# EAGLE board atlas_quad (EAGLE 8.5.0)
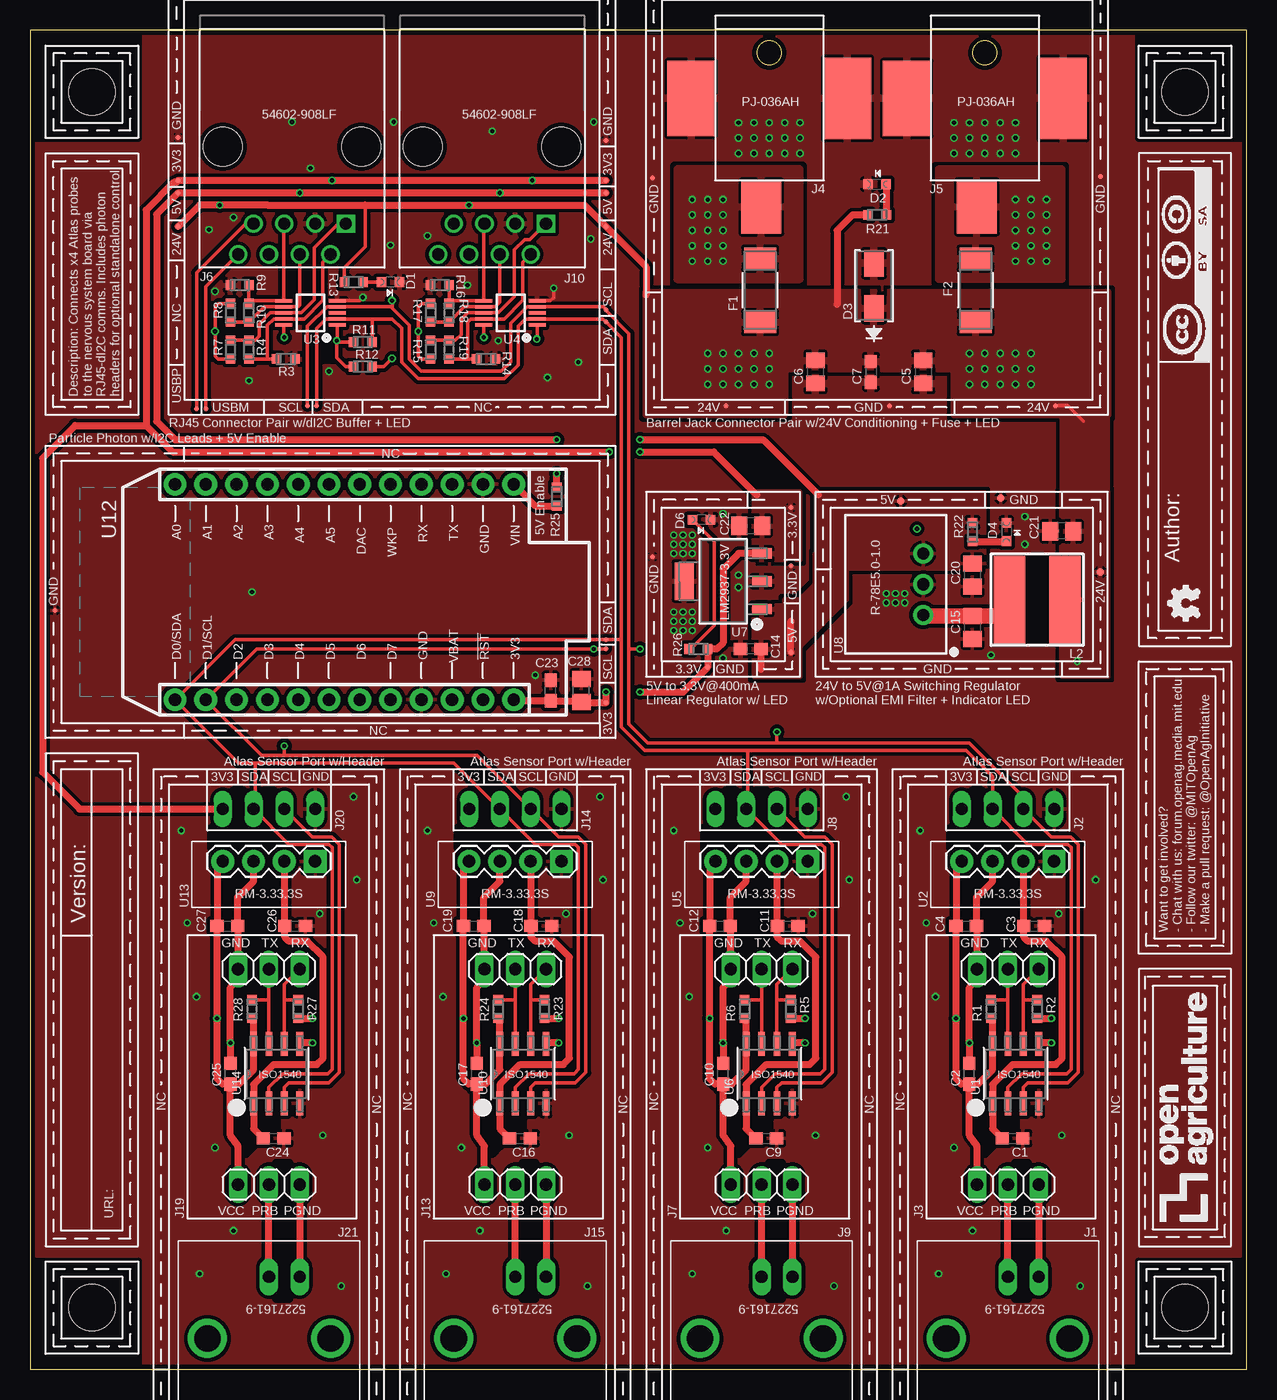
[diagram p0: board, top side]
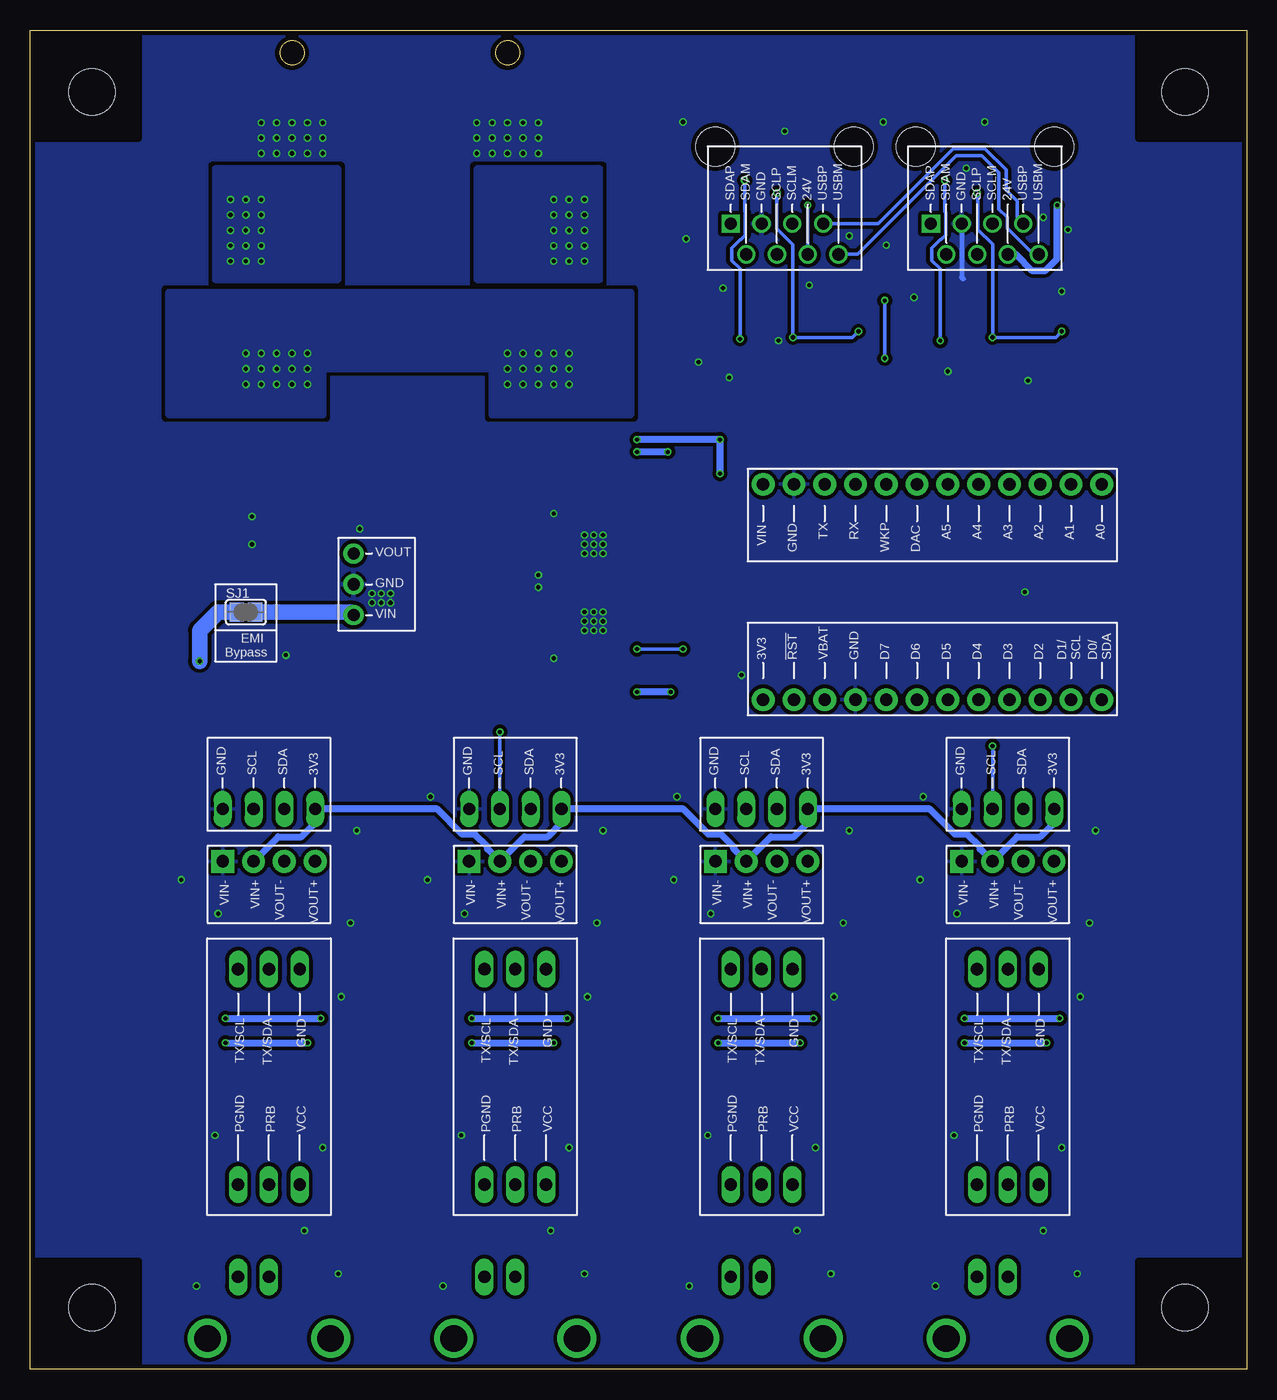
[diagram p1: board, bottom side, seen from below]

Size 100.33 x 110.49 mm. Coordinates in mm from the lower left corner, seen from the top.
Outline: 100.33,0 100.33,110.49 0,110.49 0,0 100.33,0
Copper layers (1*16): Top 0.035559375mm / dielectric 1.6mm / Bottom 0.035559375mm
Design rules "oshpark-2layer-mask": minimum track width 6mil, minimum drill 10mil, track to track 6mil, track to pad 6mil, pad to pad 6mil, via to via 6mil, smd to smd 6mil, copper to edge 15mil, drill to drill 6mil, minimum pad ring 5mil, minimum via ring 5mil, stop-mask expansion 2.5mil, vias tented up to drill 20mil, thermal gap 10mil
tRestrict: 28 lines

## Footprints (pad centres in the part's own frame; a part is rotated, then mirrored left to right if it is on the bottom)
C0603 = smd 1.1 x 1: 1 -0.85,0; 2 0.85,0
C0805 = smd 1.3 x 1.5: 1 -0.95,0; 2 0.95,0
CHIPLED_0603 = smd 0.8 x 0.8: A 0,-0.75; C 0,0.75
SMA = smd 2.18 x 1.63: 1 -1.857,0; 2 1.857,0
SS = smd 1.803 x 2.642: 1 -2.629,0; 2 2.629,0
BNC-5227161 = drill 2.2: 3 -5.08,0; 4 5.08,0 | drill 1.016 long: GND -2.54,-5.08; S 0,-5.08
HEADER-I2C = drill 1 long: 3V3 3.81,0.762; GND -3.81,0.762; SCL -1.27,0.762; SDA 1.27,0.762
ATLAS-STAMP = drill 1.016 long: 1 -8.89,2.54; 2 -8.89,0; 3 -8.89,-2.54; 4 8.89,-2.54; 5 8.89,0; 6 8.89,2.54
BARREL-JACK-PJ-036AH = smd 4.4 x 3.3: 1 2.2,-0.65 | smd 6.75 x 3.9: 2 -6.75,6.45 | smd 6.2 x 3.9: 3 -6.75,-6.45
RJ45-DI2C-USB-54602-908LF = drill 1: 24V(6) 1.905,8.89; DSCLM(5) 0.635,6.35; DSCLP(4) -0.635,8.89; DSDAM(2) -3.175,8.89; GND(3) -1.905,6.35; USBM(8) 4.445,8.89; USBP(7) 3.175,6.35 | drill 1 square: DSDAP(1) -4.445,6.35 | hole 3.2: -5.715,0; 5.715,0
29333C = smd 2.6 x 7.2: 1 -2.3,0; 2 2.3,0
RC0603N = smd 0.756 x 0.8: 1 -0.778,0; 2 0.778,0
EMI-BYPASS = smd 1.168 x 1.6: 1 -0.762,0.254; 2 0.762,0.254
TP04R = smd 0.4 x 0.4: 1 0,0
TP06R = smd 0.6 x 0.6: TP 0,0
D8 = smd 1.981 x 0.559: 1 -2.464,1.905; 2 -2.464,0.635; 3 -2.464,-0.635; 4 -2.464,-1.905; 5 2.464,-1.905; 6 2.464,-0.635; 7 2.464,0.635; 8 2.464,1.905
RM3.33.3S-SIP4 = drill 1.016 pad 1.88 square: 1 0,0 | drill 1.016 pad 1.88: 2 2.54,0; 3 5.08,0; 4 7.62,0
SOP50P490X110-10N = smd 1.4 x 0.3: 1 -2.2,1; 2 -2.2,0.5; 3 -2.2,0; 4 -2.2,-0.5; 5 -2.2,-1; 6 2.2,-1; 7 2.2,-0.5; 8 2.2,0; 9 2.2,0.5; 10 2.2,1
MP04A = smd 1.6 x 0.838: 1 -3.2,2.3; 2 -3.2,0; 3 -3.2,-2.3 | smd 1.6 x 3.099: 4 3.2,0
R-78E5.0-1.0 = drill 1 pad 1.676: 1 -2.54,0; 2 0,0; 3 2.54,0
PHOTON = drill 1.016 pad 1.88: 1 1.27,32.258; 2 1.27,29.718; 3 1.27,27.178; 4 1.27,24.638; 5 1.27,22.098; 6 1.27,19.558; 7 1.27,17.018; 8 1.27,14.478; 9 1.27,11.938; 10 1.27,9.398; 11 1.27,6.858; 12 1.27,4.318; 13 19.05,4.318; 14 19.05,6.858; 15 19.05,9.398; 16 19.05,11.938; 17 19.05,14.478; 18 19.05,17.018; 19 19.05,19.558; 20 19.05,22.098; 21 19.05,24.638; 22 19.05,27.178; 23 19.05,29.718; 24 19.05,32.258
CORNER-150 = hole 3.81: 0,0

## Placement (x,y rotation side)
C1  0.1uF  [C0603]  81.03,19.05 0 top
C2  0.1uF  [C0603]  77.47,24.38 90 top
C3  0.1uF  [C0603]  82.8,36.58 0 top
C4  0.1uF  [C0603]  77.22,36.58 0 top
C5  10uF  [C0805]  73.66,82.3 270 top
C6  4.7uF  [C0805]  64.77,82.3 270 top
C7  0.1uF  [C0603]  69.34,82.3 270 top
C9  0.1uF  [C0603]  60.71,19.05 0 top
C10  0.1uF  [C0603]  57.15,24.38 90 top
C11  0.1uF  [C0603]  62.48,36.58 0 top
C12  0.1uF  [C0603]  56.9,36.58 0 top
C14  0.1uF  [C0603]  59.44,59.44 180 top
C15  10uF  [C0805]  77.72,61.21 270 top
C16  0.1uF  [C0603]  40.39,19.05 0 top
C17  0.1uF  [C0603]  36.83,24.38 90 top
C18  0.1uF  [C0603]  42.16,36.58 0 top
C19  0.1uF  [C0603]  36.58,36.58 0 top
C20  10uF  [C0805]  77.72,65.53 270 top
C21  10uF  [C0805]  85.09,69.15 180 top
C22  10uF  [C0805]  59.44,69.6 180 top
C23  0.1uF  [C0603]  42.93,56.01 90 top
C24  0.1uF  [C0603]  20.07,19.05 0 top
C25  0.1uF  [C0603]  16.51,24.38 90 top
C26  0.1uF  [C0603]  21.84,36.58 0 top
C27  0.1uF  [C0603]  16.26,36.58 0 top
C28  4.7uF  [C0805]  45.47,56.01 90 top
D1  APT1608  [CHIPLED_0603]  29.72,89.71 270 top
D2  APT1608  [CHIPLED_0603]  69.85,97.79 90 top
D3  SMAJ26A  [SMA]  69.6,89.41 90 top
D4  APT1608  [CHIPLED_0603]  80.52,69.09 0 top
D6  APT1608  [CHIPLED_0603]  55.37,70.1 270 top
F1  SSQ5  [SS]  60.2,89.03 270 top
F2  SSQ5  [SS]  77.98,89.03 270 top
J1  5227161-9  [BNC-5227161]  80.64,2.54 180 top
J2  I2C-HEADER  [HEADER-I2C]  80.64,46.99 180 top
J3  ATLAS-STAMP  [ATLAS-STAMP]  80.64,24.13 270 top
J4  PJ-036AH  [BARREL-JACK-PJ-036AH]  60.96,98.12 270 top
J5  PJ-036AH  [BARREL-JACK-PJ-036AH]  78.74,98.12 270 top
J6  54602-908LF  [RJ45-DI2C-USB-54602-908LF]  21.59,100.89 180 top
J7  ATLAS-STAMP  [ATLAS-STAMP]  60.33,24.13 270 top
J8  I2C-HEADER  [HEADER-I2C]  60.33,46.99 180 top
J9  5227161-9  [BNC-5227161]  60.33,2.54 180 top
J10  54602-908LF  [RJ45-DI2C-USB-54602-908LF]  38.1,100.89 180 top
J13  ATLAS-STAMP  [ATLAS-STAMP]  40.01,24.13 270 top
J14  I2C-HEADER  [HEADER-I2C]  40.01,46.99 180 top
J15  5227161-9  [BNC-5227161]  40.01,2.54 180 top
J19  ATLAS-STAMP  [ATLAS-STAMP]  19.68,24.13 270 top
J20  I2C-HEADER  [HEADER-I2C]  19.68,46.99 180 top
J21  5227161-9  [BNC-5227161]  19.68,2.54 180 top
L2  33uH  [29333C]  83.06,63.5 180 top
R1  2.2k  [RC0603N]  79.25,29.72 270 top
R2  2.2k  [RC0603N]  83.06,29.72 270 top
R3  600  [RC0603N]  21.08,83.36 0 top
R4  120  [RC0603N]  18.03,84.12 270 top
R5  2.2k  [RC0603N]  62.74,29.72 270 top
R6  2.2k  [RC0603N]  58.93,29.72 270 top
R7  600  [RC0603N]  16.51,84.12 90 top
R8  600  [RC0603N]  16.51,87.17 90 top
R9  600  [RC0603N]  17.27,89.46 0 top
R10  120  [RC0603N]  18.03,87.17 270 top
R11  10K  [RC0603N]  27.43,84.76 180 top
R12  10K  [RC0603N]  27.43,82.73 180 top
R13  1K  [RC0603N]  26.67,89.71 180 top
R14  600  [RC0603N]  37.59,83.36 0 top
R15  600  [RC0603N]  33.02,84.12 90 top
R16  600  [RC0603N]  33.78,89.46 0 top
R17  600  [RC0603N]  33.02,87.17 90 top
R18  120  [RC0603N]  34.54,87.17 270 top
R19  120  [RC0603N]  34.54,84.12 270 top
R21  100  [RC0603N]  69.85,95.25 180 top
R22  100  [RC0603N]  77.72,69.09 90 top
R23  2.2k  [RC0603N]  42.42,29.72 270 top
R24  2.2k  [RC0603N]  38.61,29.72 270 top
R25  0 OHM  [RC0603N]  43.43,72.01 270 top
R26  100  [RC0603N]  55.12,59.44 0 top
R27  2.2k  [RC0603N]  22.1,29.72 270 top
R28  2.2k  [RC0603N]  18.29,29.72 270 top
SJ1  [EMI-BYPASS]  82.55,62.23 0 bottom
TP1  TPTP04R  [TP04R]  12.19,98.09 270 top
TP2  TPTP04R  [TP04R]  12.19,97.08 270 top
TP3  TPTP04R  [TP04R]  12.19,101.65 270 top
TP4  TPTP04R  [TP04R]  12.19,94.28 270 top
TP5  TPTP04R  [TP04R]  23.62,79.5 270 top
TP6  TPTP04R  [TP04R]  22.86,79.5 270 top
TP7  TPTP04R  [TP04R]  13.72,79.25 270 top
TP8  TPTP04R  [TP04R]  14.48,79.25 270 top
TP9  TPTP04R  [TP04R]  47.5,98.09 270 top
TP10  TPTP04R  [TP04R]  47.5,97.08 270 top
TP11  TPTP04R  [TP04R]  47.5,94.28 270 top
TP12  TPTP04R  [TP04R]  47.5,101.4 270 top
TP13  TPTP04R  [TP04R]  47.5,87.43 270 top
TP14  TPTP04R  [TP04R]  47.5,86.41 270 top
TP15  TPTP04R  [TP04R]  51.31,98.3 0 top
TP17  TPTP04R  [TP04R]  84.58,79.5 0 top
TP18  TPTP04R  [TP04R]  70.87,79.5 0 top
TP19  TPTP04R  [TP04R]  88.27,98.42 0 top
TP20  TPTP04R  [TP04R]  57.4,79.5 0 top
TP23  TPTP06R  [TP06R]  71.82,71.63 90 top
TP24  TPTP06R  [TP06R]  88.27,65.79 90 top
TP25  TPTP06R  [TP06R]  80.07,71.88 90 top
TP28  TPTP04R  [TP04R]  55.88,57.91 90 top
TP29  TPTP04R  [TP04R]  62.74,59.18 90 top
TP30  TPTP04R  [TP04R]  51.31,67.06 90 top
TP31  TPTP04R  [TP04R]  62.74,71.12 90 top
TP32  TPTP04R  [TP04R]  62.74,66.29 90 top
TP58  TPTP04R  [TP04R]  47.5,59.44 180 top
TP71  TPTP04R  [TP04R]  47.5,54.99 180 top
TP72  TPTP04R  [TP04R]  2.03,62.61 180 top
TP73  TPTP04R  [TP04R]  47.5,60.2 180 top
U1  ISO1540  [D8]  81.28,24.38 90 top
U2  RM-3.33.3S  [RM3.33.3S-SIP4]  84.45,41.91 180 top
U3  PCA9615  [SOP50P490X110-10N]  23.11,87.17 180 top
U4  PCA9615  [SOP50P490X110-10N]  39.62,87.17 180 top
U5  RM-3.33.3S  [RM3.33.3S-SIP4]  64.14,41.91 180 top
U6  ISO1540  [D8]  60.96,24.38 90 top
U7  LM2937-3.3V  [MP04A]  57.15,65.02 180 top
U8  R-78E5.0-1.0  [R-78E5.0-1.0]  73.66,64.77 90 top
U9  RM-3.33.3S  [RM3.33.3S-SIP4]  43.81,41.91 180 top
U10  ISO1540  [D8]  40.64,24.38 90 top
U12  PHOTONH  [PHOTON]  7.62,74.3 270 top
U13  RM-3.33.3S  [RM3.33.3S-SIP4]  23.5,41.91 180 top
U14  ISO1540  [D8]  20.32,24.38 90 top
U$1  [CORNER-150]  95.25,5.08 90 top
U$2  [CORNER-150]  95.25,105.41 180 top
U$3  [CORNER-150]  5.08,5.08 0 top
U$4  [CORNER-150]  5.08,105.41 270 top
U$5  AUTHOR  [AUTHOR]  99.06,59.69 90 top
U$6  TITLE  [TITLE]  8.89,10.16 90 top
U$8  [LOGO-900X300]  99.06,10.16 90 top

## Library data of the parts
C1-C4 C7 C9-C12 C14 C16-C19 C23-C27 = openag-capacitors; MANUFACTURER: Kemet; MPN: C0603C104K5RACTU; VENDOR: Digikey; VLINK: https://www.digikey.com/product-detail/en/kemet/C0603C104K5RACTU/399-5089-1-ND/1465623; VPN: 399-5089-1-ND
C5 C15 C20-C22 = openag-capacitors; MANUFACTURER: Taiyo Yuden; MPN: GMK212BBJ106KG-T; VENDOR: Digikey; VLINK: https://www.digikey.com/product-detail/en/taiyo-yuden/GMK212BBJ106KG-T/587-4893-1-ND/6563736; VPN: 587-4893-1-ND
C6 C28 = openag-capacitors; MANUFACTURER: Samsung; MPN: CL21A475KBQNNNE; VENDOR: Digikey; VLINK: https://www.digikey.com/product-detail/en/samsung-electro-mechanics/CL21A475KBQNNNE/1276-1248-1-ND/3889334; VPN: 1276-1248-1-ND
D1 D2 D4 D6 = openag-diodes; MANUFACTURER: Kingbright; MPN: APT1608CGCK; VENDOR: Digikey; VLINK: https://www.digikey.com/product-detail/en/kingbright/APT1608CGCK/754-1116-1-ND/1747833#; VPN: 754-1116-1-ND
D3 = openag-diodes; MANUFACTURER: Diodes Incorporated; MPN: SMAJ26A-13-F; VENDOR: Digikey; VLINK: https://www.digikey.com/product-detail/en/diodes-incorporated/SMAJ26A-13-F/SMAJ26A-FDICT-ND/806583; VPN: SMAJ26A-FDICT-ND
F1 F2 = openag-fuses; MANUFACTURER: Bel Fuse Inc.; MPN: SSQ5; VENDOR: Digikey; VLINK: https://www.digikey.com/product-detail/en/bel-fuse-inc/SSQ-5/507-1053-1-ND/615005; VPN: 507-1053-1-ND
J1 J9 J15 J21 = openag-connectors; MANUFACTURER: TE Connectivity AMP Connectors; MPN: 5227161-9; VENDOR: Digikey; VLINK: https://www.digikey.com/product-detail/en/te-connectivity-amp-connectors/5227161-9/A32261-ND/811159; VPN: A32261-ND
J2 J3 J7 J8 J13 J14 J19 J20 SJ1 = openag-connectors; MPN: N/A
J4 J5 = openag-connectors; MANUFACTURER: CUI Inc.; MPN: PJ-036AH-SMT-TR; VENDOR: Digikey; VLINK: https://www.digikey.com/product-detail/en/cui-inc/PJ-036AH-SMT-TR/CP-036AHPJCT-ND/1530994; VPN: CP-036AHPJCT-ND
J6 J10 = openag-connectors; MANUFACTURER: Amphenol FCI; MPN: 54602-908LF; VENDOR: Digikey; VLINK: https://www.digikey.com/product-detail/en/amphenol-fci/54602-908LF/609-1046-ND/1001360; VPN: 609-1046-ND
L2 = openag-inductors; MANUFACTURER: Murata Power Solutions Inc.; MPN: 29333C; VENDOR: Digikey; VLINK: https://www.digikey.com/product-detail/en/murata-power-solutions-inc/29333C/811-1138-1-ND/1924860; VPN: 811-1138-1-ND
R1 R2 R5 R6 R23 R24 R27 R28 = openag-resistors; MANUFACTURER: Yageo; MPN: RC0603JR-072K2L; VENDOR: Digikey; VLINK: https://www.digikey.com/product-detail/en/yageo/RC0603JR-072K2L/311-2.2KGRCT-ND/729676#; VPN: 311-2.2KGRCT-ND
R3 R7-R9 R14-R17 = openag-resistors; MANUFACTURER: Yageo; MPN: RC0603FR-07604RL; VENDOR: Digikey; VLINK: https://www.digikey.com/product-detail/en/yageo/RC0603FR-07604RL/311-604HRCT-ND/730276; VPN: 311-604HRCT-ND
R4 R10 R18 R19 = openag-resistors; MANUFACTURER: Yageo; MPN: RC0603FR-07120RL; VENDOR: Digikey; VLINK: https://www.digikey.com/product-detail/en/yageo/RC0603FR-07120RL/311-120HRCT-ND/729867; VPN: 311-120HRCT-ND
R11 R12 = openag-resistors; MANUFACTURER: Panasonic; MPN: ERJ-3EKF1002V; VENDOR: Digikey; VLINK: https://www.digikey.com/product-detail/en/panasonic-electronic-components/ERJ-3EKF1002V/P10.0KHCT-ND/198102; VPN: P10.0KHCT-ND
R13 = openag-resistors; MANUFACTURER: Panasonic; MPN: P20283CT-ND; VENDOR: Digikey; VLINK: https://www.digikey.com/product-detail/en/panasonic-electronic-components/ERJ-PB3D1001V/P20283CT-ND/6214538; VPN: P20283CT-ND
R21 R22 R26 = openag-resistors; MANUFACTURER: Yageo; MPN: RC0603JR-07100RL; VENDOR: Digikey; VLINK: https://www.digikey.com/product-detail/en/yageo/RC0603JR-07100RL/311-100GRCT-ND/729644; VPN: 311-100GRCT-ND
R25 = openag-resistors; MANUFACTURER: Yageo; MPN: RC0603JR-070RL; VENDOR: Digikey; VLINK: https://www.digikey.com/product-detail/en/yageo/RC0603JR-070RL/311-0.0GRCT-ND/729622; VPN: 311-0.0GRCT-ND
TP1-TP15 TP17-TP20 TP23-TP25 TP28-TP32 TP58 TP71-TP73 = openag-testpads; MPN: N/A
U1 U6 U10 U14 = openag-isolators; MANUFACTURER: Texas Instruments; MPN: ISO1540DR; VENDOR: Digikey; VLINK: https://www.digikey.com/product-detail/en/texas-instruments/ISO1540DR/296-34871-1-ND/3587214; VPN: 296-34871-1-ND
U2 U5 U9 U13 = openag-isolators; MANUFACTURER: Recom Power; MPN: RM-3.33.3S; VENDOR: Digikey; VLINK: https://www.digikey.com/product-detail/en/recom-power/RM-3.33.3S/945-1212-ND/2256392; VPN: 945-1212-ND
U3 U4 = openag-buffers; MANUFACTURER: NXP USA Inc.; MPN: PCA9615DPJ; VENDOR: Digikey; VLINK: https://www.digikey.com/product-detail/en/nxp-usa-inc/PCA9615DPJ/568-11484-1-ND/4864508; VPN: 568-11484-1-ND
U7 = openag-regulators; MANUFACTURER: Texas Instruments; MPN: LM2937IMP-3.3/NOPB; VENDOR: Digikey; VLINK: https://www.digikey.com/product-detail/en/texas-instruments/LM2937IMP-3.3-NOPB/LM2937IMP-3.3-NOPBCT-ND/270742#; VPN: LM2937IMP-3.3/NOPBCT-ND
U8 = openag-regulators; MANUFACTURER: Recom Power; MPN: R-78E5.0-1.0; VENDOR: Digikey; VLINK: https://www.digikey.com/product-detail/en/recom-power/R-78E5.0-1.0/945-2201-ND/4930585; VPN: 945-2201-ND
U12 = openag-microcontrollers; MANUFACTURER: Particle; MPN: PHOTONH; VENDOR: Particle; VLINK: https://store.particle.io/products/photon; VPN: PHOTONH
U$1-U$4 U$8 = openag-frames
U$5 = openag-frames; AUTHOR: Jake Rye; MPN: N/A
U$6 = openag-frames; MPN: N/A; TITLE: Atlas Port Quad; URL: https://github.com/openaginitiative/openag_eagle/proj/atlas-port/quad; VER: 1.0

## Nets
24V_EMI: C15.1 L2.2 SJ1.2 U8.1
24V_IN1: F2.1 J5.1
24V_IN2: F1.1 J4.1
+3V3: C1.1 C3.1 C9.1 C11.1 C16.1 C18.1 C22.1 C23.1 C24.1 C26.1 C28.1 J2.3V3 J8.3V3 J14.3V3 J20.3V3 R11.2 R12.2 R26.2 TP1.1 TP9.1 TP28.1 TP31.1 TP71.1 U1.1 U2.2 U3.1 U4.1 U5.2 U6.1 U7.3 U9.2 U10.1 U12.24 U13.2 U14.1
+5V: C14.1 C20.1 R7.1 R8.2 R15.1 R17.2 R22.2 R25.1 TP2.1 TP10.1 TP23.TP TP29.1 U3.10 U4.10 U7.1 U8.3
+24V: C5.1 C6.1 C7.1 C21.1 D3.1 F1.2 F2.2 J6.24V(6) J10.24V(6) L2.1 R13.2 R21.2 SJ1.1 TP4.1 TP11.1 TP17.1 TP20.1 TP24.TP
DSCLM_1: J6.DSCLM(5) R9.2 R10.1 U3.6
DSCLM_2: J10.DSCLM(5) R16.2 R18.1 U4.6
DSCLP_1: J6.DSCLP(4) R8.1 R10.2 U3.7
DSCLP_2: J10.DSCLP(4) R17.1 R18.2 U4.7
DSDAM_1: J6.DSDAM(2) R3.1 R4.2 U3.9
DSDAM_2: J10.DSDAM(2) R14.1 R19.2 U4.9
DSDAP_1: J6.DSDAP(1) R4.1 R7.2 U3.8
DSDAP_3: J10.DSDAP(1) R15.2 R19.1 U4.8
GND: C1.2 C3.2 C5.2 C6.2 C7.2 C9.2 C11.2 C14.2 C15.2 C16.2 C18.2 C20.2 C21.2 C22.2 C23.2 C24.2 C26.2 C28.2 D1.C D2.C D3.2 D4.C D6.C J2.GND J4.2 J4.3 J5.2 J5.3 J6.GND(3) J8.GND J10.GND(3) J14.GND J20.GND R3.2 R9.1 R14.2 R16.1 TP3.1 TP12.1 TP15.1 TP18.1 TP19.1 TP25.TP TP30.1 TP32.1 TP72.1 U1.4 U2.1 U3.5 U4.5 U5.1 U6.4 U7.2 U7.4 U8.2 U9.1 U10.4 U12.2 U12.21 U13.1 U14.4
ISO_3V3_1: C2.1 C4.1 J3.4 R1.2 R2.2 U1.8 U2.4
ISO_3V3_2: C10.1 C12.1 J7.4 R5.2 R6.2 U5.4 U6.8
ISO_3V3_3: C17.1 C19.1 J13.4 R23.2 R24.2 U9.4 U10.8
ISO_3V3_4: C25.1 C27.1 J19.4 R27.2 R28.2 U13.4 U14.8
ISO_GND_1: C2.2 C4.2 J3.3 U1.5 U2.3
ISO_GND_2: C10.2 C12.2 J7.3 U5.3 U6.5
ISO_GND_3: C17.2 C19.2 J13.3 U9.3 U10.5
ISO_GND_4: C25.2 C27.2 J19.3 U13.3 U14.5
ISO_SCL_1: J3.1 R2.1 U1.6
ISO_SCL_2: J7.1 R5.1 U6.6
ISO_SCL_3: J13.1 R23.1 U10.6
ISO_SCL_4: J19.1 R27.1 U14.6
ISO_SDA_1: J3.2 R1.1 U1.7
ISO_SDA_2: J7.2 R6.1 U6.7
ISO_SDA_3: J13.2 R24.1 U10.7
ISO_SDA_4: J19.2 R28.1 U14.7
N$4: R25.2 U12.1
N$5: D1.A R13.1
N$6: D2.A R21.1
N$8: D4.A R22.1
N$11: D6.A R26.1
PGND_1: J1.GND J3.6
PGND_2: J7.6 J9.GND
PGND_3: J13.6 J15.GND
PGND_4: J19.6 J21.GND
PRB_1: J1.S J3.5
PRB_2: J7.5 J9.S
PRB_3: J13.5 J15.S
PRB_4: J19.5 J21.S
SCL: J2.SCL J8.SCL J14.SCL J20.SCL R12.1 TP6.1 TP13.1 TP58.1 U1.3 U3.4 U4.4 U6.3 U10.3 U12.14 U14.3
SDA: J2.SDA J8.SDA J14.SDA J20.SDA R11.1 TP5.1 TP14.1 TP73.1 U1.2 U3.2 U4.2 U6.2 U10.2 U12.13 U14.2
USBM: J6.USBM(8) J10.USBM(8) TP8.1
USBP: J6.USBP(7) J10.USBP(7) TP7.1
VBAT: U12.22

## Tracks (layer width: path | path; a pad name or v marks a point on that pad's centre or on a via)
24V_EMI
  Top 1.27: U8.1 73.73,62.16 C15.1 79.42,62.16 arc90 L2.2
  Bottom 1.27: SJ1.2 73.91,62.48 U8.1
24V_IN1  (via drill 0.35)
  other vias: 81.28,96.52 82.55,96.52 83.82,96.52 81.28,95.25 81.28,93.98 81.28,92.71 81.28,91.44 82.55,91.44 82.55,92.71 82.55,93.98 82.55,95.25 83.82,95.25 83.82,93.98 83.82,92.71 83.82,91.44
  pour Top (isolate 0.406): 85.09,89.92 74.93,89.92 74.93,99.06 85.09,99.06
  pour Bottom (isolate 0.406): 74.93,89.92 74.93,99.06 85.09,99.06 85.09,89.92
24V_IN2  (via drill 0.35)
  other vias: 54.61,96.52 55.88,96.52 57.15,96.52 54.61,95.25 54.61,93.98 54.61,92.71 54.61,91.44 57.15,91.44 57.15,92.71 57.15,93.98 57.15,95.25 55.88,95.25 55.88,93.98 55.88,92.71 55.88,91.44
  pour Top (isolate 0.406): 53.34,99.06 53.34,89.92 63.5,89.92 63.5,99.06
  pour Bottom (isolate 0.406): 53.34,89.92 53.34,99.06 63.5,99.06 63.5,89.92
+3V3  (via drill 0.35)
  Top 0.305: v25.27,84.89 25.4,84.76 R11.2 | v41.78,85.01 41.82,85.06 U4.1 | v25.27,84.89 25.27,83.49 26.04,82.73 R12.2 | U3.1 25.31,84.93 v25.27,84.89
  Top 0.559: C1.1 79.38,19.85 U1.1 79.38,23.5 81.03,25.15 84.61,25.15 85.11,25.65 85.11,34.01 83.82,35.31 82.3,35.31 81.95,35.65 C3.1 81.95,41.87 U2.2 | C9.1 59.05,19.85 U6.1 59.05,23.5 60.71,25.15 64.29,25.15 64.8,25.65 64.8,34.01 63.5,35.31 61.98,35.31 61.63,35.65 C11.1 61.63,41.87 U5.2 | TP9.1 v41.4,98.09 v24.89,98.09 TP1.1 12.04,97.94 11.83,97.94 9.55,95.66 9.55,77.87 | C16.1 38.73,19.85 U10.1 38.73,23.5 40.39,25.15 43.97,25.15 44.48,25.65 44.48,34.01 43.18,35.31 41.66,35.31 41.31,35.65 C18.1 41.31,41.87 U9.2 | C24.1 18.41,19.85 U14.1 18.41,23.5 20.07,25.15 23.65,25.15 24.16,25.65 24.16,34.01 22.86,35.31 21.34,35.31 20.99,35.65 C26.1 20.99,41.87 U13.2 | 43.03,55.06 C23.1 | C23.1 39.97,55.16 U12.24 | C23.1 45.62,55.16 C28.1 45.53,54.99 TP71.1 v47.5,55.88 | U7.3 58.43,67.32 57.15,66.04 57.15,59.94 56.64,59.44 R26.2 55.88,59.42 TP28.1 53.85,55.88 v50.29,55.88 | 9.55,77.87 11.73,75.69 v47.75,75.69 | v50.29,75.69 56.39,75.69 59.94,72.14 | 9.55,77.87 3.71,77.87 1.02,75.18 1.02,49.28 4.06,46.23 J20.3V3
  Bottom 0.305: v25.27,84.89 25.27,90.8 25.97,91.5 25.97,92.5 25.27,93.21 25.22,93.21 24.83,93.6 24.83,95.48 24.89,95.54 v24.89,98.09 | v41.4,98.09 41.4,95.54 41.34,95.48 41.34,93.6 41.73,93.21 41.77,93.21 42.48,92.5 42.48,91.5 41.78,90.8 v41.78,85.01
  Bottom 0.559: U2.2 79.88,43.94 77.98,43.94 76.83,45.09 J2.3V3 66.77,46.23 64.69,44.14 63.66,44.14 62.61,43.09 62.61,42.93 U5.2 59.56,43.94 57.66,43.94 56.52,45.09 J8.3V3 46.45,46.23 44.37,44.14 43.34,44.14 42.29,43.09 42.29,42.93 U9.2 39.24,43.94 37.34,43.94 36.2,45.09 J14.3V3 26.13,46.23 24.05,44.14 23.02,44.14 21.97,43.09 21.97,42.93 U13.2 18.92,43.94 17.02,43.94 15.88,45.09 J20.3V3 | v47.75,75.69 v50.29,75.69 | v47.5,55.88 v50.29,55.88
  pour Top (isolate 0.305): 63.5,72.39 59.69,72.39 59.69,66.8 63.5,66.8
+5V  (via drill 0.35)
  Top 0.305: v37.41,85.14 37.42,85.15 U4.10 | R17.2 32.27,87.95 32,87.68 v32,85.65 32,83.62 32.27,83.35 R15.1 | v20.95,85.14 20.91,85.18 U3.10 | R8.2 15.51,87.95 15.24,87.68 v15.24,85.65 15.24,83.62 15.51,83.35 R7.1
  Top 0.559: TP10.1 v38.73,97.08 v22.23,97.08 TP2.1 10.41,95.3 10.41,78.23 11.94,76.71 v43.43,76.71 | 60.29,57.75 C14.1 | TP29.1 62.74,61.72 | v50.29,76.71 60.45,76.71 65.02,72.14 | R25.1 v43.43,73.91
  Bottom 0.305: v32,85.65 32.51,85.14 v37.41,85.14 37.41,92.78 38.73,94.1 v38.73,97.08 | v22.23,97.08 22.16,97.02 22.16,94.04 20.95,92.83 v20.95,85.14 15.75,85.14 v15.24,85.65
  Bottom 0.559: v50.29,76.71 v43.43,76.71 v43.43,73.91
  pour Top (isolate 0.305): 64.77,72.39 78.74,72.39 78.74,66.04 64.77,66.04
  pour Top (isolate 0.305): 63.5,57.15 63.5,62.99 59.69,62.99 59.69,57.15
  pour Top (isolate 0.406): 62.23,63.5 63.5,63.5 64.77,64.77 64.77,67.31 67.31,67.31 67.31,66.04 67.31,63.5 63.5,59.69 62.23,59.69
+24V  (via drill 0.35)
  Top 0.305: 19.68,95.94 19.56,96.06 | 27.62,96.06 27.62,92.63 25.89,90.9 R13.2 | TP17.1 85.6,79.5 86.87,78.23
  Top 0.559: TP4.1 13.97,96.06 v15.62,96.06 19.56,96.06 27.62,96.06 v36.2,96.06 45.72,96.06 TP11.1 50.8,90.98 50.8,88.65 | R21.2 67.82,95.25 66.55,93.98 66.55,87.88
  Bottom 0.305: J10.24V(6) v36.2,96.06
  Bottom 0.559: v15.62,96.06 15.62,91.63 16.59,90.67 17.7,90.67 19.03,92 J6.24V(6)
  Bottom 1.27: SJ1.1 84.84,62.48 86.36,60.96 v86.36,58.42
  other vias: 60.96,83.82 59.69,83.82 58.42,83.82 57.15,83.82 55.88,83.82 55.88,82.55 55.88,81.28 57.15,81.28 57.15,82.55 58.42,82.55 59.69,82.55 60.96,82.55 60.96,81.28 59.69,81.28 58.42,81.28 77.47,83.82 78.74,83.82 80.01,83.82 81.28,83.82 82.55,83.82 82.55,82.55 82.55,81.28 81.28,81.28 81.28,82.55 80.01,82.55 80.01,81.28 78.74,81.28 78.74,82.55 77.47,82.55 77.47,81.28
  pour Top (isolate 0.406): 50.8,78.74 50.8,88.9 88.9,88.9 88.9,78.74 76.2,78.74 76.2,82.55 62.23,82.55 62.23,78.74
  pour Bottom (isolate 0.406): 50.8,78.74 62.23,78.74 62.23,82.55 76.2,82.55 76.2,78.74 88.9,78.74 88.9,88.9 50.8,88.9
  pour Top (isolate 0.406): 85.09,72.39 88.9,72.39 88.9,57.15 85.09,57.15
  pour Top (isolate 0.406): 88.9,80.01 85.09,80.01 85.09,71.12 88.9,71.12
DSCLM_1
  Top 0.305: 18.03,88.19 R10.1 18.07,88.05 18.19,88.17 U3.6 20.91,94.5 J6.DSCLM(5) | 18.03,88.19 18.03,89.44 R9.2 | 18.05,88.17 18.03,88.19
DSCLM_2
  Top 0.305: R16.2 34.54,89.44 R18.1 34.77,88.17 U4.6 37.42,94.5 J10.DSCLM(5)
DSCLP_1
  Top 0.305: R8.1 R10.2 19.31,87.67 U3.7 22.09,87.67 22.23,87.81 J6.DSCLP(4)
DSCLP_2
  Top 0.305: R17.1 R18.2 34.54,86.41 35.81,87.67 U4.7 38.35,87.67 38.73,88.06 J10.DSCLP(4)
DSDAM_1
  Top 0.305: R4.2 19.56,83.35 | 19.56,83.35 20.03,83.35 R3.1 | 19.56,83.35 19.56,86.16 20.07,86.67 U3.9 22.6,86.67 24.13,88.2 24.13,91.36 J6.DSDAM(2)
DSDAM_2
  Top 0.305: R14.1 36.07,83.36 | 36.07,83.36 36.07,86.41 36.33,86.67 U4.9 39.11,86.67 | 36.07,83.36 34.56,83.36 R19.2 | 39.11,86.67 39.12,86.67 | 39.11,86.67 40.64,88.2 40.64,91.36 J10.DSDAM(2)
DSDAP_1
  Top 0.305: R4.1 R7.2 | 18.03,84.97 R4.1 | R4.1 18.56,84.9 18.89,85.24 18.89,86.25 19.81,87.17 U3.8 22.35,87.17 23.43,88.25 23.43,92.57 25.4,94.54 J6.DSDAP(1)
DSDAP_3
  Top 0.305: R15.2 R19.1 35.07,84.9 35.56,85.39 35.56,86.67 36.07,87.17 U4.8 38.61,87.17 39.94,88.51 39.94,92.37 40.77,93.21 41.21,93.21 J10.DSDAP(1)
GND  (via drill 0.35)
  Top 0.305: U3.5 26.65,88.17 | 26.65,88.17 26.67,88.19 | 26.65,88.17 27.16,88.17 v27.43,88.44 | U4.5 42.91,88.17 43.18,88.44 v43.18,89.2
  Bottom 0.406: J6.GND(3) 23.5,90.09 23.37,89.97
  other vias: 73.91,36.83 84.84,37.59 85.09,19.3 76.2,18.29 74.68,30.73 74.93,7.87 86.61,6.86 77.72,11.43 87.88,40.39 73.41,44.45 53.59,36.83 67.31,47.24 64.52,37.59 64.77,19.3 55.88,18.29 54.36,30.73 54.61,7.87 66.29,6.86 57.4,11.43 67.56,40.39 53.09,44.45 21.59,102.92 18.03,81.58 29.97,102.92 38.1,102.16 29.72,92.76 46.48,102.92 38.61,84.89 15.24,88.95 45.21,83.11 42.67,81.84 24.64,82.35 16.76,95.05 32.77,93.52 23.11,99.11 14.73,94.03 36.07,89.46 46.23,93.27 33.27,36.83 46.99,47.24 44.2,37.59 44.45,19.3 35.56,18.29 34.04,30.73 34.29,7.87 45.97,6.86 37.08,11.43 47.24,40.39 32.77,44.45 12.95,36.83 26.67,47.24 23.88,37.59 24.13,19.3 15.24,18.29 13.72,30.73 13.97,7.87 25.65,6.86 16.76,11.43 26.92,40.39 12.45,44.45 76.2,102.87 77.47,102.87 78.74,102.87 80.01,102.87 81.28,102.87 81.28,101.6 81.28,100.33 80.01,100.33 78.74,100.33 77.47,100.33 76.2,100.33 76.2,101.6 77.47,101.6 78.74,101.6 80.01,101.6 58.42,100.33 58.42,101.6 58.42,102.87 59.69,102.87 60.96,102.87 62.23,102.87 63.5,102.87 63.5,101.6 63.5,100.33 62.23,100.33 60.96,100.33 59.69,100.33 59.69,101.6 60.96,101.6 62.23,101.6 41.66,57.28 18.29,64.14 73.15,69.34 82.04,68.07 79.25,58.93 72.14,64.01 71.37,64.01 71.37,63.25 72.14,63.25 70.61,64.01 70.61,63.25 82.04,70.36 53.85,62.48 54.61,62.48 53.85,61.72 54.61,61.72 54.61,60.96 53.85,60.96 53.09,62.48 53.09,60.96 53.09,61.72 54.61,67.31 54.61,68.07 54.61,68.83 53.85,67.31 53.09,67.31 53.85,68.07 53.09,68.07 53.09,68.83 53.85,68.83 58.42,64.52 57.15,70.61 58.42,65.53 57.15,58.67
  pour Top (isolate 0.305, rank 3): 100.33,0 100.33,110.49 0,110.49 0,0
  pour Bottom (isolate 0.305, rank 3): 100.33,0 100.33,110.49 0,110.49 0,0
  pour Bottom (isolate 0.305, rank 2): 90.17,49.53 90.17,0 71.12,0 71.12,49.53
  pour Top (isolate 0.305, rank 2): 90.17,0 71.12,0 71.12,49.53 90.17,49.53
  pour Bottom (isolate 0.305, rank 2): 69.85,49.53 69.85,0 50.8,0 50.8,49.53
  pour Top (isolate 0.305, rank 2): 69.85,0 50.8,0 50.8,49.53 69.85,49.53
  pour Top (isolate 0.305): 11.43,114.3 11.43,78.74 48.26,78.74 48.26,114.3
  pour Bottom (isolate 0.406): 11.43,78.74 48.26,78.74 48.26,114.3 11.43,114.3
  pour Top (isolate 0.305, rank 3): 50.8,78.74 50.8,114.3 88.9,114.3 88.9,78.74
  pour Bottom (isolate 0.406, rank 3): 50.8,114.3 88.9,114.3 88.9,78.74 50.8,78.74
  pour Bottom (isolate 0.305, rank 2): 49.53,49.53 49.53,0 30.48,0 30.48,49.53
  pour Top (isolate 0.305, rank 2): 49.53,0 30.48,0 30.48,49.53 49.53,49.53
  pour Bottom (isolate 0.305, rank 2): 29.21,49.53 29.21,0 10.16,0 10.16,49.53
  pour Top (isolate 0.305, rank 2): 29.21,0 10.16,0 10.16,49.53 29.21,49.53
  pour Top (isolate 0.305): 48.26,76.2 1.27,76.2 1.27,52.07 48.26,52.07
  pour Bottom (isolate 0.305): 48.26,76.2 48.26,52.07 1.27,52.07 1.27,76.2
  pour Top (isolate 0.305, rank 2): 64.77,72.39 88.9,72.39 88.9,57.15 64.77,57.15
  pour Bottom (isolate 0.406, rank 2): 64.77,57.15 88.9,57.15 88.9,72.39 64.77,72.39
  pour Top (isolate 0.406, rank 3): 50.8,57.15 63.5,57.15 63.5,72.39 50.8,72.39
  pour Bottom (isolate 0.406): 50.8,57.15 50.8,72.39 63.5,72.39 63.5,57.15
ISO_3V3_1  (via drill 0.35)
  Top 0.559: R1.2 79.38,28.81 U1.8 79.38,24.72 78.19,23.53 C2.1 | J3.4 78.11,18.41 77.47,19.3 C2.1 | C2.1 76.8,23.53 76.37,23.96 v76.37,28.96 C4.1 76.37,41.44 U2.4 | R2.2 83.07,28.96 v84.23,28.96
  Bottom 0.559: v84.23,28.96 v76.37,28.96
ISO_3V3_2  (via drill 0.35)
  Top 0.559: R6.2 59.05,28.81 U6.8 59.05,24.72 57.87,23.53 C10.1 | J7.4 57.78,18.41 57.15,19.3 C10.1 | C10.1 56.48,23.53 56.05,23.96 v56.05,28.96 C12.1 56.05,41.44 U5.4 | R5.2 62.75,28.96 v63.91,28.96
  Bottom 0.559: v63.91,28.96 v56.05,28.96
ISO_3V3_3  (via drill 0.35)
  Top 0.559: R24.2 38.73,28.81 U10.8 38.73,24.72 37.55,23.53 C17.1 | J13.4 37.47,18.41 36.83,19.3 C17.1 | C17.1 36.16,23.53 35.73,23.96 v35.73,28.96 C19.1 35.73,41.44 U9.4 | R23.2 42.43,28.96 v43.59,28.96
  Bottom 0.559: v43.59,28.96 v35.73,28.96
ISO_3V3_4  (via drill 0.35)
  Top 0.559: R28.2 18.41,28.81 U14.8 18.41,24.72 17.23,23.53 C25.1 | J19.4 17.14,18.41 16.51,19.3 C25.1 | C25.1 15.84,23.53 15.41,23.96 v15.41,28.96 C27.1 15.41,41.44 U13.4 | R27.2 22.11,28.96 v23.27,28.96
  Bottom 0.559: v23.27,28.96 v15.41,28.96
ISO_GND_1  (via drill 0.35)
  Top 0.559: C2.2 v77.47,26.92 77.47,31.5 78.11,32.13 J3.3 78.11,36.54 C4.2 78.07,38.95 79.38,40.26 U2.3 | v84.23,26.92 83.26,26.92 U1.5
  Bottom 0.559: v84.23,26.92 v77.47,26.92
ISO_GND_2  (via drill 0.35)
  Top 0.559: C10.2 v57.15,26.92 57.15,31.5 57.78,32.13 J7.3 57.78,36.54 C12.2 57.75,38.95 59.05,40.26 U5.3 | v63.91,26.92 62.94,26.92 U6.5
  Bottom 0.559: v63.91,26.92 v57.15,26.92
ISO_GND_3  (via drill 0.35)
  Top 0.559: C17.2 v36.83,26.92 36.83,31.5 37.47,32.13 J13.3 37.47,36.54 C19.2 37.43,38.95 38.73,40.26 U9.3 | v43.59,26.92 42.62,26.92 U10.5
  Bottom 0.559: v43.59,26.92 v36.83,26.92
ISO_GND_4  (via drill 0.35)
  Top 0.559: C25.2 v16.51,26.92 16.51,31.5 17.14,32.13 J19.3 17.14,36.54 C27.2 17.11,38.95 18.41,40.26 U13.3 | v23.27,26.92 22.3,26.92 U14.5
  Bottom 0.559: v23.27,26.92 v16.51,26.92
ISO_SCL_1
  Top 0.305: 81.92,30.48 81.92,31.75 J3.1 | R2.1 83.04,30.48 81.92,30.48 | 81.92,30.48 U1.6
ISO_SCL_2
  Top 0.305: 61.59,30.48 61.59,31.75 J7.1 | R5.1 62.72,30.48 61.59,30.48 | 61.59,30.48 U6.6
ISO_SCL_3
  Top 0.305: 41.27,30.48 41.27,31.75 J13.1 | R23.1 42.4,30.48 41.27,30.48 | 41.27,30.48 U10.6
ISO_SCL_4
  Top 0.305: 20.95,30.48 20.95,31.75 J19.1 | R27.1 22.08,30.48 20.95,30.48 | 20.95,30.48 U14.6
ISO_SDA_1
  Top 0.305: 80.64,30.48 J3.2 | R1.1 80.63,30.5 80.64,30.48 | 80.64,30.48 U1.7
ISO_SDA_2
  Top 0.305: 60.33,30.48 J7.2 | R6.1 60.31,30.5 60.33,30.48 | 60.33,30.48 U6.7
ISO_SDA_3
  Top 0.305: 40.01,30.48 J13.2 | R24.1 39.99,30.5 40.01,30.48 | 40.01,30.48 U10.7
ISO_SDA_4
  Top 0.305: 19.68,30.48 J19.2 | R28.1 19.67,30.5 19.68,30.48 | 19.68,30.48 U14.7
N$4
  Top 0.559: 40.01,72.9 U12.1 41.67,71.23 R25.2
N$5
  Top 0.305: R13.1 D1.A
N$6
  Top 0.559: D2.A 70.6,95.28 R21.1
N$8
  Top 0.559: R22.1 80.49,68.31 D4.A
N$11
  Top 0.305: D6.A 56.41,68.31 56.41,61.38 54.47,59.44 R26.1
PGND_1
  Top 0.559: J3.6 J1.GND
PGND_2
  Top 0.559: J7.6 J9.GND
PGND_3
  Top 0.559: J13.6 J15.GND
PGND_4
  Top 0.559: J19.6 J21.GND
PRB_1
  Top 0.559: J1.S J3.5
PRB_2
  Top 0.559: J9.S J7.5
PRB_3
  Top 0.559: J15.S J13.5
PRB_4
  Top 0.559: J21.S J19.5
SCL  (via drill 0.35)
  Top 0.305: U1.3 81.92,23.24 82.3,23.62 85.6,23.62 86.46,24.49 86.46,43.29 85.84,43.92 84.23,43.92 J2.SCL 81.83,46.31 81.83,47.3 77.47,51.66 61.59,51.66 | J8.SCL 63.91,43.92 65.52,43.92 66.14,43.29 66.14,24.49 65.28,23.62 61.98,23.62 61.59,23.24 U6.3 | U10.3 41.27,23.24 41.66,23.62 44.96,23.62 45.82,24.49 45.82,43.29 45.2,43.92 43.59,43.92 J14.SCL 36.85,50.65 20.95,50.65 | J20.SCL 23.27,43.92 24.88,43.92 25.5,43.29 25.5,24.49 24.64,23.62 21.34,23.62 20.95,23.24 U14.3 | TP6.1 22.86,86.06 24.48,87.67 U3.4 29.73,87.67 29.85,87.55 | 31.5,83.11 31.24,83.36 31.24,86.16 29.85,87.55 | 29.85,87.55 29.85,88.18 v29.84,88.19 | v29.84,83.43 29.15,82.73 R12.1 | 31.5,83.11 | 31.5,83.11 32.26,82.35 38.86,82.35 39.62,83.11 39.62,86.31 40.99,87.67 U4.4 47.25,87.67 TP13.1 47.5,87.34 49.38,85.46 49.38,59.44 | 49.38,59.44 49.38,53.24 50.95,51.66 61.59,51.66 | v61.59,52.58 61.59,51.66 | TP58.1 v46.48,59.44 18.67,59.44 U12.14 19.07,50.65 20.95,50.65 | v50.29,59.44 49.38,59.44 | v20.95,51.44 20.95,50.65
  Bottom 0.305: v29.84,88.19 v29.84,83.43 | J8.SCL v61.59,52.58 | v46.48,59.44 v50.29,59.44 | J20.SCL v20.95,51.44
SDA
  Top 0.305: U1.2 80.64,23.24 81.79,24.38 85.5,24.38 85.85,24.74 85.85,43.04 85.58,43.31 82.3,43.31 J2.SDA 79.38,48.9 77.22,51.05 59.18,51.05 | U6.2 60.33,23.24 61.47,24.38 65.18,24.38 65.53,24.74 65.53,43.04 65.26,43.31 61.98,43.31 J8.SDA 59.18,46.23 59.18,51.05 | U10.2 40.01,23.24 41.15,24.38 44.86,24.38 45.21,24.74 45.21,43.04 44.94,43.31 41.66,43.31 J14.SDA 34.92,50.04 18.54,50.04 | U14.2 19.68,23.24 20.83,24.38 24.54,24.38 24.89,24.74 24.89,43.04 24.62,43.31 21.34,43.31 J20.SDA 18.54,46.23 18.54,50.04 | TP5.1 23.62,85.9 24.39,86.67 U3.2 28.19,86.67 | 28.19,86.67 29.86,86.67 30.63,85.9 30.63,83.11 32.01,81.74 39.12,81.74 40.23,82.86 40.23,86.06 40.85,86.67 U4.2 47.24,86.67 TP14.1 48.77,85.14 48.77,60.2 | R11.1 28.21,86.66 28.19,86.67 | 48.77,60.2 48.77,52.99 50.7,51.05 59.18,51.05 | 48.77,60.2 TP73.1 16.89,60.2 U12.13 17.14,50.04 18.54,50.04
USBM
  Top 0.305: TP8.1 14.48,89.33 J6.USBM(8)
  Bottom 0.305: J10.USBM(8) 32.06,92 23.94,100.12 21.84,100.12 20.44,98.73 20.44,95.75 19.75,95.05 19.75,94.16 17.58,92 J6.USBM(8)
USBP
  Top 0.305: TP7.1 13.72,90.47 17.78,94.54 J6.USBP(7)
  Bottom 0.305: J6.USBP(7) 18.93,95.05 18.93,96.38 19.84,97.29 19.84,98.98 21.59,100.73 24.19,100.73 30.38,94.54 J10.USBP(7)

## Text on the board
tPlace: EDGE | EDGE | GND | GND | 3V3 | 3V3 | GND | GND | 5V | 5V | 24V | 24V | NC | SCL | SDA | USBP | Description: Connects x4 Atlas probes / to the nervous system board via / RJ45-dI2C comms. Includes photon / headers for optional standalone control. | SCL | 24V | GND | 24V | USBM | SDA | NC | RJ45 Connector Pair w/dI2C Buffer + LED | Barrel Jack Connector Pair w/24V Conditioning + Fuse + LED | Particle Photon w/I2C Leads + 5V Enable | NC | 5V | GND | 5V Enable | 3.3V | GND | GND | GND | 24V | SDA | 5V | SCL | 3.3V | GND | GND | 5V to 3.3V@400mA / Linear Regulator w/ LED | 24V to 5V@1A Switching Regulator / w/Optional EMI Filter + Indicator LED | 3V3 | NC | Atlas Sensor Port w/Header | Atlas Sensor Port w/Header | Atlas Sensor Port w/Header | Atlas Sensor Port w/Header | Want to get involved? / - Chat with us: forum.openag.media.mit.edu / - Follow our twitter: @MITOpenAg / - Make a pull request: @OpenAgInitiative | NC | NC | NC | NC | NC | NC | NC | NC | EDGE | EDGE | EDGE | EDGE